# Altium PCB Insole_ver2.PcbDoc (part 2 of 3)
Units mil, origin at the board's own origin, x right, y up, seen from the top; angles counter-clockwise.
Board outline 8634.93 x 10258.5 mil, 2 copper layers (Top Layer, Bottom Layer); 507 components, 50 nets, 1329 pads, 253 vias.
Unrouted connection lines stored in the file: 728.
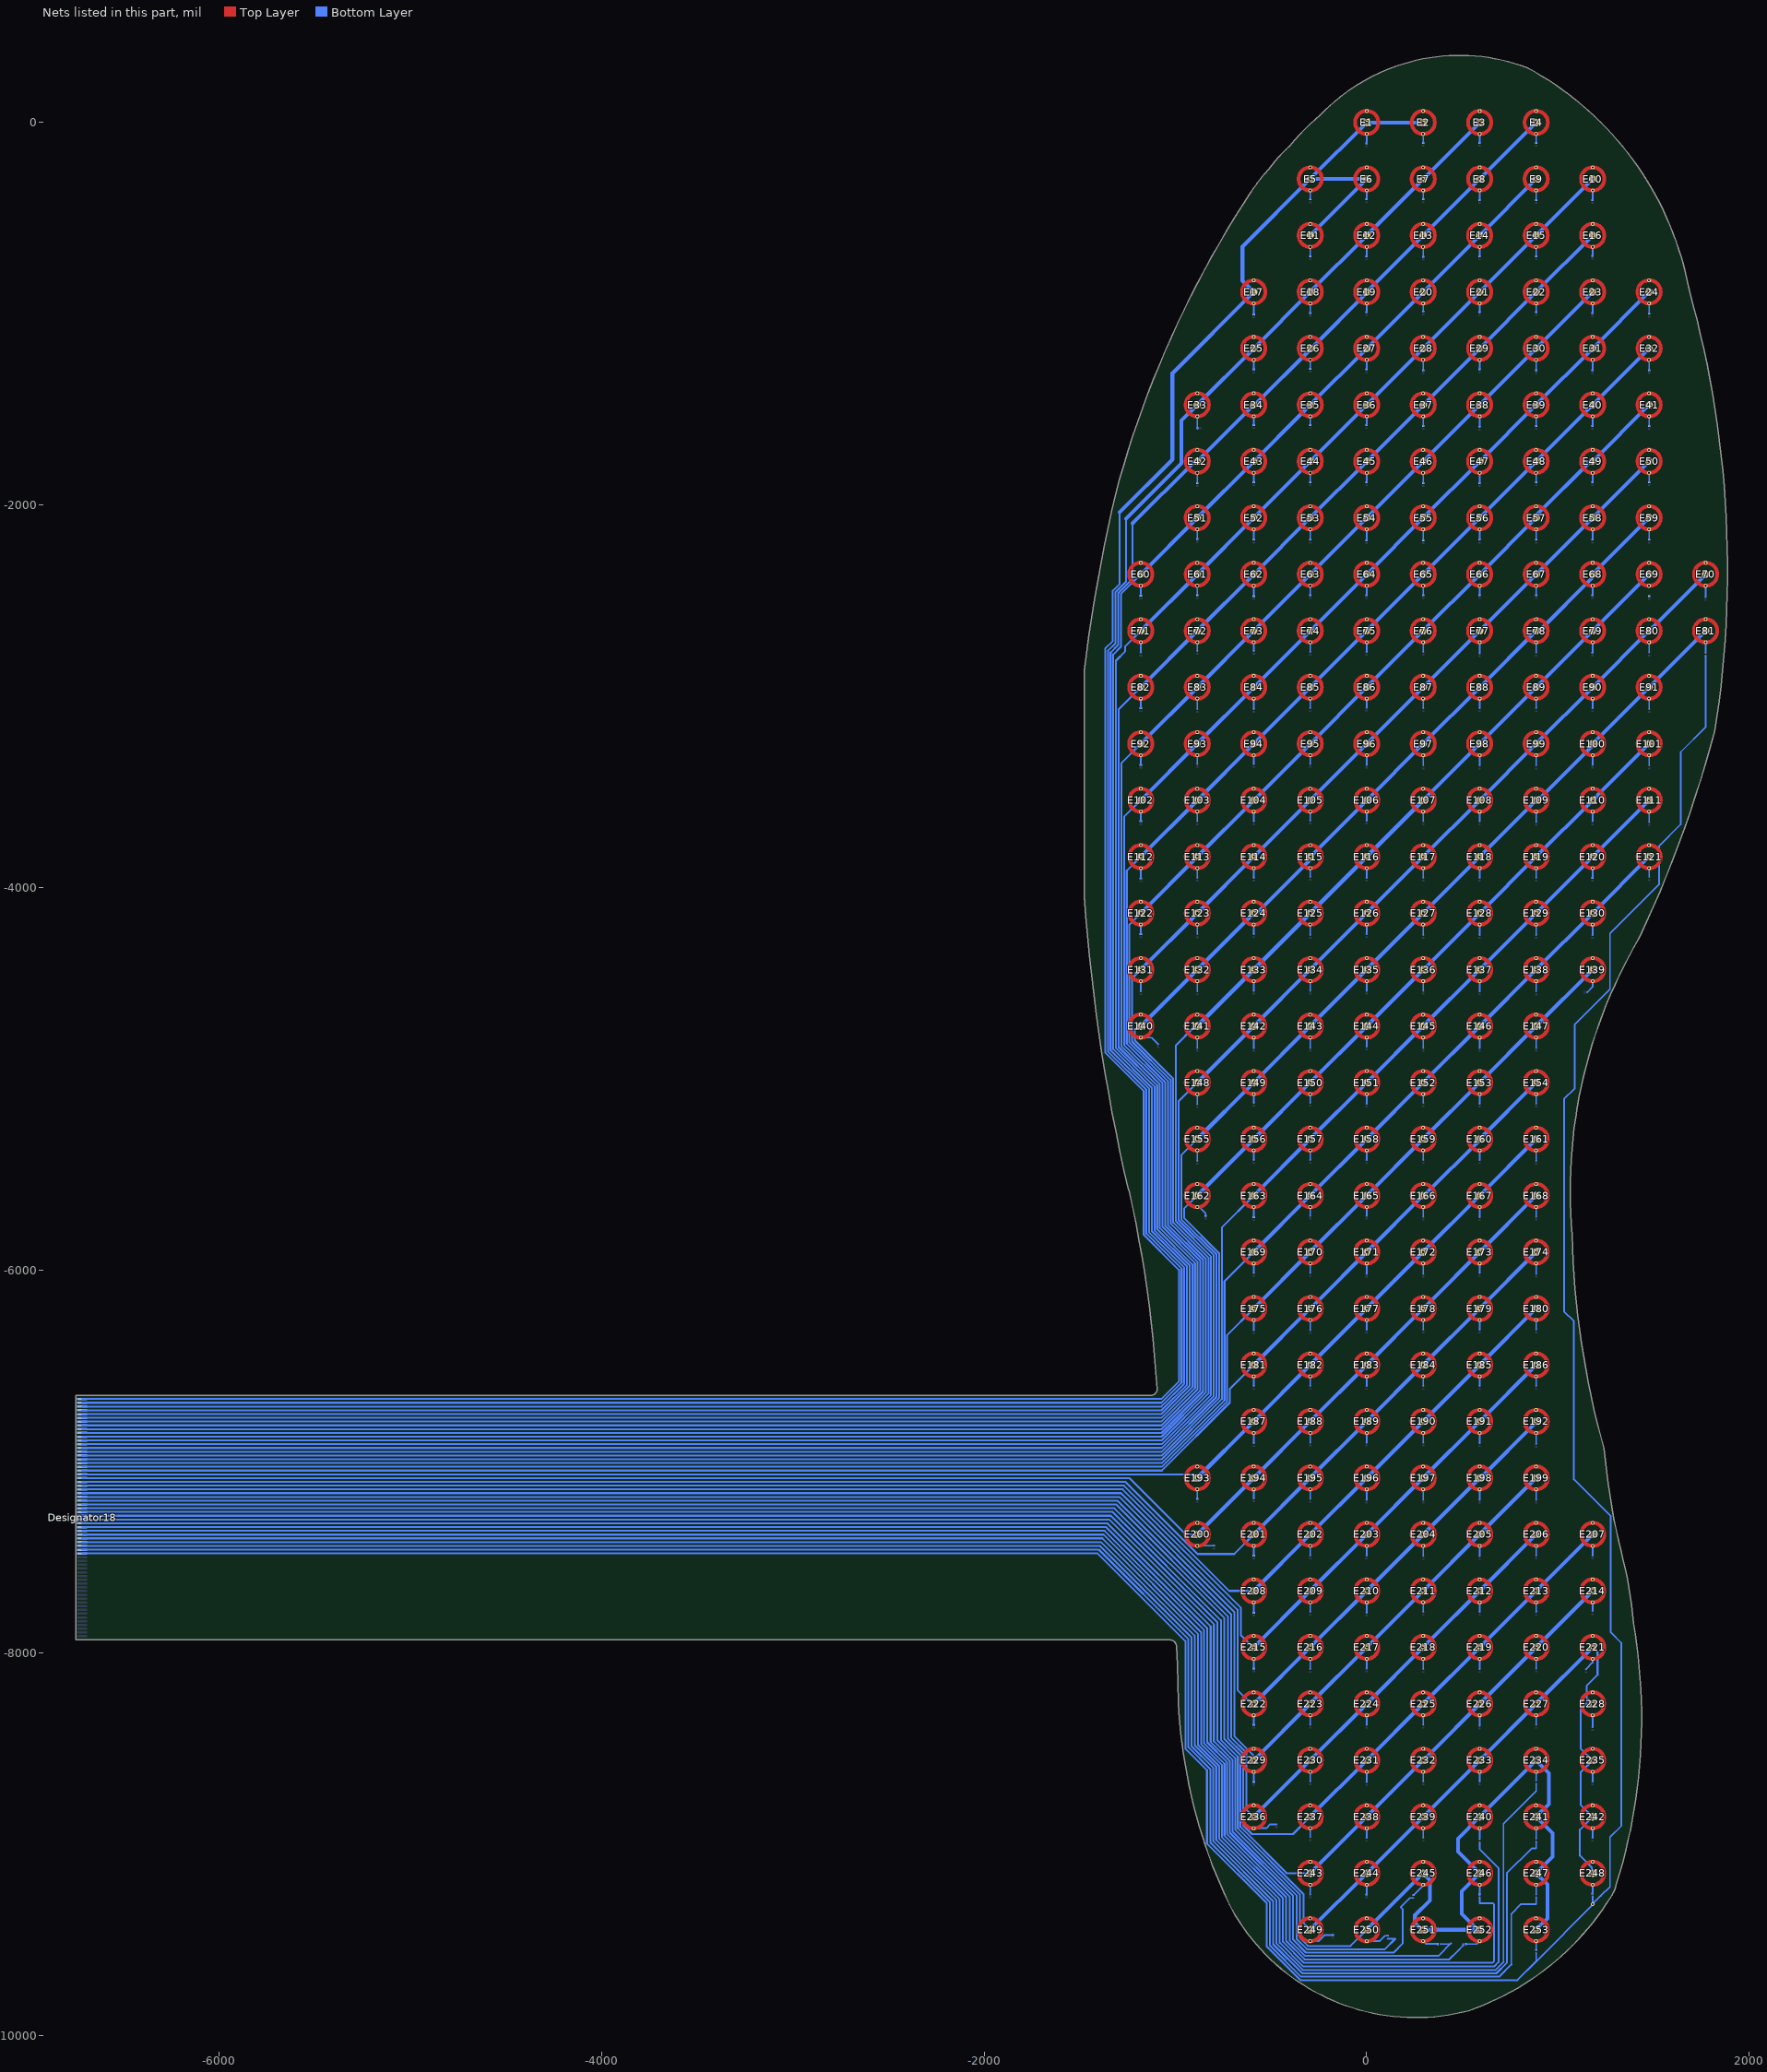
[diagram p2: the nets of this part, all layers, seen from the top]

## Part data
D? D?1 D?2 D?3 D?4 D?5 D?6 D?7 D?8 D?9 D?10 D?11 D?12 D?13 D?14 D?15 D?16 D?17 D?18 D?19 D?20 D?21 D?22 D?23 D?24 D?25 D?26 D?27 D?28 D?29 D?30 D?31 D?32 D?33 D?34 D?35 D?36 D?37 D?38 D?39 D?40 D?41 D?42 D?43 D?44 D?45 D?46 D?47 D?48 D?49 D?50 D?51 D?52 D?53 D?54 D?55 D?56 D?57 D?58 D?59 D?60 D?61 D?62 D?63 D?64 D?65 D?66 D?67 D?68 D?69 D?70 D?71 D?72 D?73 D?74 D?75 D?76 D?77 D?78 D?79 D?80 D?81 D?82 D?83 D?84 D?85 D?86 D?87 D?88 D?89 D?90 D?91 D?92 D?93 D?94 D?95 D?96 D?97 D?98 D?99 D?100 D?101 D?102 D?103 D?104 D?105 D?106 D?107 D?108 D?109 D?110 D?111 D?112 D?113 D?114 D?115 D?116 D?117 D?118 D?119 D?120 D?121 D?122 D?123 D?124 D?125 D?126 D?127 D?128 D?129 D?130 D?131 D?132 D?133 D?134 D?135 D?136 D?137 D?138 D?139 D?140 D?141 D?142 D?143 D?144 D?145 D?146 D?147 D?148 D?149 D?150 D?151 D?152 D?153 D?154 D?155 D?156 D?157 D?158 D?159 D?160 D?161 D?162 D?163 D?164 D?165 D?166 D?167 D?168 D?169 D?170 D?171 D?172 D?173 D?174 D?175 D?176 D?177 D?178 D?179 D?180 D?181 D?182 D?183 D?184 D?185 D?186 D?187 D?188 D?189 D?190 D?191 D?192 D?193 D?194 D?195 D?196 D?197 D?198 D?199 D?200 D?201 D?202 D?203 D?204 D?205 D?206 D?207 D?208 D?209 D?210 D?211 D?212 D?213 D?214 D?215 D?216 D?217 D?218 D?219 D?220 D?221 D?222 D?223 D?224 D?225 D?226 D?227 D?228 D?229 D?230 D?231 D?232 D?233 D?234 D?235 D?236 D?237 D?238 D?239 D?240 D?241 D?242 D?243 D?244 D?245 D?246 D?247 D?248 D?249 D?250 D?251 D?252: "Schottky Diode", Manufacturer_Name="ROHM Semiconductor", Mouser Part Number=755-RB520ZS-30T2R, Datasheet Link=https://fscdn.rohm.com/en/products/databook/datasheet/discrete/diode/schottky_barrier/rb520zs-30t2r-e.pdf, Height=0.36mm, Manufacturer_Part_Number=RB520ZS-30T2R, Mouser Price/Stock=https://www.mouser.com/Search/Refine.aspx?Keyword=755-RB520ZS-30T2R
E1 E2 E3 E4 E5 E6 E7 E8 E9 E10 E11 E12 E13 E14 E15 E16 E17 E18 E19 E20 E21 E22 E23 E24 E25 E26 E27 E28 E29 E30 E31 E32 E33 E34 E35 E36 E37 E38 E39 E40 E41 E42 E43 E44 E45 E46 E47 E48 E49 E50 E51 E52 E53 E54 E55 E56 E57 E58 E59 E60 E61 E62 E63 E64 E65 E66 E67 E68 E69 E70 E71 E72 E73 E74 E75 E76 E77 E78 E79 E80 E81 E82 E83 E84 E85 E86 E87 E88 E89 E90 E91 E92 E93 E94 E95 E96 E97 E98 E99 E100 E101 E102 E103 E104 E105 E106 E107 E108 E109 E110 E111 E112 E113 E114 E115 E116 E117 E118 E119 E120 E121 E122 E123 E124 E125 E126 E127 E128 E129 E130 E131 E132 E133 E134 E135 E136 E137 E138 E139 E140 E141 E142 E143 E144 E145 E146 E147 E148 E149 E150 E151 E152 E153 E154 E155 E156 E157 E158 E159 E160 E161 E162 E163 E164 E165 E166 E167 E168 E169 E170 E171 E172 E173 E174 E175 E176 E177 E178 E179 E180 E181 E182 E183 E184 E185 E186 E187 E188 E189 E190 E191 E192 E193 E194 E195 E196 E197 E198 E199 E200 E201 E202 E203 E204 E205 E206 E207 E208 E209 E210 E211 E212 E213 E214 E215 E216 E217 E218 E219 E220 E221 E222 E223 E224 E225 E226 E227 E228 E229 E230 E231 E232 E233 E234 E235 E236 E237 E238 E239 E240 E241 E242 E243 E244 E245 E246 E247 E248 E249 E250 E251 E252 E253: library part CMP-065-000001-1, Component Type=Standard, Design Item ID=Insole_electrode_v1, Pin Count=2, Source="Sheet1_sensor_mat_inso_v1 1.SCHLIB"

## Via types
v1: diameter 19.68, hole 9.84, Top Layer to Bottom Layer, tented both sides, 252 vias
v2: diameter 23.62, hole 9.84, Top Layer to Bottom Layer, tented both sides, 1 vias

## Nets (pads, with @x,y where several pads share a name; then routed paths per layer and width w, separated by ;. In a path a pad name is that pad's centre, name@x,y a point inside that pad or via, vN(x,y) a via of type N, cw(c..) or ccw(c..) an arc to the next point about the centre after c; other vN are vias at no path point)
Col1: D?1.2 D?2.2 D?3.2 D?5.2 D?6.2 D?7.2 D?8.2 D?9.2 D?15.2 D?16.2 D?20.2 D?21.2 D?22.2 D?23.2 D?24.2 D?25.2 D?26.2 D?30.2 D?31.2 D?.2 Designator18.33 E17.1 E33.1 E42.1 E60.1 E71.1 E82.1 E92.1 E102.1 E112.1 E122.1 E131.1 E140.1 E141.1 E148.1 E155.1 E162.1 E163.1 E169.1 E175.1 E181.1 E193.1 E200.1 E201.1 E208.1 E215.1 E222.1 E229.1 E236.1 E237.1 E243.1 E249.1 E250.1 | length 10577.6
  Bottom Layer w9: E140.1@-1181.1,-4784.41 -1125.04,-4784.41 -1090.55,-4818.9 ; -1181.1,-4543.31 E131.1@-1181.1,-4489.13 ; D?9.2@-1181.1,-4244.09 E122.1@-1181.1,-4193.86 ; D?8.2@-1181.1,-3952.76 E112.1@-1181.1,-3898.58 ; D?7.2@-1181.1,-3653.54 E102.1@-1181.1,-3603.31 ; D?6.2@-1181.1,-3358.27 E92.1@-1181.1,-3308.03 ; D?5.2@-1181.1,-3062.99 E82.1@-1181.1,-3012.76 ; -1181.1,-2771.65 E71.1@-1181.1,-2717.48 ; D?3.2@-1181.1,-2473.23 E60.1@-1181.1,-2422.2 ; E200.1@-885.83,-7441.89 -884.88,-7440.94 D?21.2@-799.21,-7440.94 ; D?20.2@-885.83,-7196.85 E193.1@-885.83,-7146.61 ; E162.1@-885.83,-5670.24 -883.85,-5672.21 -872.79,-5672.21 -842.52,-5702.48 D?15.2@-842.52,-5716.54 ; -885.83,-5429.13 E155.1@-885.83,-5374.96 ; -885.83,-5133.86 E148.1@-885.83,-5079.69 ; -885.83,-4838.58 E141.1@-885.83,-4784.41 ; D?2.2@-885.83,-1885.83 E42.1@-885.83,-1831.65 ; E33.1@-885.83,-1536.38 -885.83,-1597.01 -885.04,-1597.8 D?1.2@-885.04,-1598.43 ; E236.1@-590.55,-8918.27 -524.57,-8918.27 -503.94,-8897.64 -472.44,-8897.64 ; D?26.2@-590.55,-8677.17 E229.1@-590.55,-8622.99 ; D?25.2@-590.55,-8377.95 E222.1@-590.55,-8327.72 ; D?24.2@-590.55,-8082.68 E215.1@-590.55,-8032.44 ; D?23.2@-590.55,-7791.34 E208.1@-590.55,-7737.17 ; D?22.2@-590.55,-7492.13 E201.1@-590.55,-7441.89 ; -590.55,-6606.3 E181.1@-590.55,-6556.06 ; -590.55,-6314.96 E175.1@-590.55,-6260.79 ; -590.55,-6015.75 E169.1@-590.55,-5965.51 ; D?16.2@-590.55,-5724.41 E163.1@-590.55,-5670.24 ; D?.2@-590.55,-1003.94 E17.1@-590.55,-945.83 ; E249.1@-295.28,-9508.82 -252.91,-9508.82 -221.26,-9477.17 D?30.2@-177.17,-9477.17 ; -295.28,-9263.78 E243.1@-295.28,-9213.54 ; -295.28,-8964.57 E237.1@-295.28,-8918.27 ; E250.1@0,-9508.82 65.98,-9508.82 94.49,-9480.32 D?31.2@110.24,-9480.32 ; 110.24,-9495.28 147.54,-9495.28 147.98,-9495.72 149.26,-9495.72 149.61,-9496.06
  Bottom Layer w10: Designator18.33@-6715.55,-7304.13 -1345.87,-7304.13 -799,-7851 -799,-8463 -701.67,-8560.33 -701.67,-8934.33 -367,-9269 -367,-9496 -312,-9551 94.67,-9551 149.61,-9496.06
Col2: D?32.2 D?33.2 D?34.2 D?35.2 D?36.2 D?62.2 D?63.2 Designator18.34 E5.1 E25.1 E34.1 E51.1 E61.1 E72.1 E83.1 E93.1 E103.1 E113.1 E123.1 E132.1 E133.1 E142.1 E149.1 E156.1 E157.1 E164.1 E170.1 E176.1 E187.1 E194.1 E195.1 E202.1 E209.1 E216.1 E223.1 E230.1 E231.1 E238.1 E244.1 E245.1 | length 10475.2
  Bottom Layer w9: -885.83,-4543.31 E132.1@-885.83,-4489.13 ; -885.83,-4244.88 E123.1@-885.83,-4193.86 ; -885.83,-3948.82 E113.1@-885.83,-3898.58 ; -885.83,-3654.33 E103.1@-885.83,-3603.31 ; -885.83,-3354.33 E93.1@-885.83,-3308.03 ; -885.83,-3066.93 E83.1@-885.83,-3012.76 ; -885.83,-2763.78 E72.1@-885.83,-2717.48 ; D?36.2@-885.83,-2469.91 E61.1@-885.83,-2422.2 ; D?35.2@-885.83,-2177.17 E51.1@-885.83,-2126.93 ; -590.55,-7193.7 E194.1@-590.55,-7146.61 ; -590.55,-6905.51 E187.1@-590.55,-6851.34 ; -590.55,-5425.2 E156.1@-590.55,-5374.96 ; -590.55,-5125.98 E149.1@-590.55,-5079.69 ; -590.55,-4838.58 E142.1@-590.55,-4784.41 ; -590.55,-4539.37 E133.1@-590.55,-4489.13 ; D?34.2@-590.55,-1582.68 E34.1@-590.55,-1536.38 ; D?33.2@-590.55,-1291.34 E25.1@-590.55,-1241.1 ; -295.28,-8673.23 E230.1@-295.28,-8622.99 ; -295.28,-8377.95 E223.1@-295.28,-8327.72 ; -295.28,-8086.61 E216.1@-295.28,-8032.44 ; -295.28,-7787.4 E209.1@-295.28,-7737.17 ; -295.28,-7492.13 E202.1@-295.28,-7441.89 ; -295.28,-7196.85 E195.1@-295.28,-7146.61 ; -295.28,-6314.96 E176.1@-295.28,-6260.79 ; -295.28,-6015.75 E170.1@-295.28,-5965.51 ; -295.28,-5716.54 E164.1@-295.28,-5670.24 ; -295.28,-5425.2 E157.1@-295.28,-5374.96 ; D?32.2@-295.28,-402.36 E5.1@-295.28,-355.28 ; D?62.2@0,-9263.78 E244.1@0,-9213.54 ; 0,-8968.5 E238.1@0,-8918.27 ; 0,-8677.17 E231.1@0,-8622.99 ; 188.98,-9519.68 188.98,-9342.52 177.17,-9330.71 225.2,-9282.68 244.09,-9282.68 ; D?63.2@244.09,-9267.72 290.43,-9221.38 290.43,-9221.01 295.28,-9216.16 E245.1@295.28,-9213.54
  Bottom Layer w10: Designator18.34@-6715.55,-7323.82 -1355.18,-7323.82 -816,-7863 -816,-8467 -715.67,-8567.33 -715.67,-8941.33 -385,-9272 -385,-9501 -318,-9568 140.66,-9568 188.98,-9519.68
Col3: D?64.2 D?65.2 D?66.2 D?68.2 D?69.2 D?70.2 D?96.2 Designator18.35 E11.1 E18.1 E26.1 E43.1 E52.1 E62.1 E73.1 E84.1 E94.1 E104.1 E114.1 E124.1 E125.1 E134.1 E143.1 E150.1 E151.1 E158.1 E165.1 E171.1 E182.1 E188.1 E189.1 E196.1 E203.1 E210.1 E217.1 E224.1 E225.1 E232.1 E239.1 E251.1 | length 10523.7
  Bottom Layer w9: -590.55,-4244.09 E124.1@-590.55,-4193.86 ; -590.55,-3948.82 E114.1@-590.55,-3898.58 ; -590.55,-3653.54 E104.1@-590.55,-3603.31 ; -590.55,-3354.72 E94.1@-590.55,-3308.03 ; -590.55,-3066.93 E84.1@-590.55,-3012.76 ; -590.55,-2763.78 E73.1@-590.55,-2717.48 ; D?70.2@-590.55,-2473.58 E62.1@-590.55,-2422.2 ; D?69.2@-590.55,-2181.1 E52.1@-590.55,-2126.93 ; D?68.2@-590.55,-1881.89 E43.1@-590.55,-1831.65 ; -295.28,-6901.57 E188.1@-295.28,-6851.34 ; -295.28,-6606.3 E182.1@-295.28,-6556.06 ; -295.28,-5126.38 E150.1@-295.28,-5079.69 ; -295.28,-4838.58 E143.1@-295.28,-4784.41 ; -295.28,-4539.37 E134.1@-295.28,-4489.13 ; -295.28,-4248.03 E125.1@-295.28,-4193.86 ; D?66.2@-295.28,-1287.4 E26.1@-295.28,-1241.1 ; D?65.2@-295.28,-996.06 E18.1@-295.28,-945.83 ; D?64.2@-295.28,-700.79 E11.1@-295.28,-650.55 ; 0,-8377.95 E224.1@0,-8327.72 ; 0,-8083.46 E217.1@0,-8032.44 ; 0,-7791.34 E210.1@0,-7737.17 ; 0,-7492.13 E203.1@0,-7441.89 ; 0,-7200.79 E196.1@0,-7146.61 ; 0,-6901.57 E189.1@0,-6851.34 ; 0,-6020.08 E171.1@0,-5965.51 ; 0,-5716.54 E165.1@0,-5670.24 ; 0,-5425.2 E158.1@0,-5374.96 ; 0,-5129.92 E151.1@0,-5079.69 ; E251.1@295.28,-9508.82 308.85,-9522.39 369.64,-9522.39 D?96.2@370.87,-9523.62 ; 295.28,-8968.5 E239.1@295.28,-8918.27 ; 295.28,-8673.23 E232.1@295.28,-8622.99 ; 295.28,-8377.95 E225.1@295.28,-8327.72 ; 385.83,-9523.62 437.01,-9523.62 440.94,-9519.68
  Bottom Layer w10: Designator18.35@-6715.55,-7343.5 -1362.5,-7343.5 -834,-7872 -834,-8469 -729.67,-8573.33 -729.67,-8949.33 -403,-9276 -403,-9505 -322,-9586 374.63,-9586 440.94,-9519.68
Col4: D?67.2 D?97.2 D?98.2 D?99.2 D?104.2 D?105.2 D?106.2 D?219.2 Designator18.36 E6.1 E12.1 E19.1 E35.1 E44.1 E53.1 E63.1 E74.1 E85.1 E95.1 E105.1 E115.1 E116.1 E126.1 E135.1 E144.1 E145.1 E152.1 E159.1 E166.1 E177.1 E183.1 E184.1 E190.1 E197.1 E204.1 E211.1 E218.1 E219.1 E226.1 E233.1 E252.1 | length 10519.4
  Bottom Layer w9: -295.28,-3944.88 E115.1@-295.28,-3898.58 ; -295.28,-3649.61 E105.1@-295.28,-3603.31 ; -295.28,-3354.33 E95.1@-295.28,-3308.03 ; -295.28,-3062.99 E85.1@-295.28,-3012.76 ; -295.28,-2767.72 E74.1@-295.28,-2717.48 ; D?106.2@-295.28,-2472.44 E63.1@-295.28,-2422.2 ; D?105.2@-295.28,-2181.1 E53.1@-295.28,-2126.93 ; D?104.2@-295.28,-1881.89 E44.1@-295.28,-1831.65 ; D?67.2@-295.28,-1582.68 E35.1@-295.28,-1536.38 ; 0,-6606.3 E183.1@0,-6556.06 ; 0,-6311.02 E177.1@0,-6260.79 ; 0,-4831.5 E144.1@0,-4784.41 ; 0,-4539.37 E135.1@0,-4489.13 ; 0,-4244.09 E126.1@0,-4193.86 ; 0,-3948.82 E116.1@0,-3898.58 ; D?99.2@0,-992.13 E19.1@0,-945.83 ; D?98.2@0,-700.79 E12.1@0,-650.55 ; D?97.2@0,-401.57 E6.1@0,-355.28 ; 295.28,-8086.61 E218.1@295.28,-8032.44 ; 295.28,-7787.4 E211.1@295.28,-7737.17 ; 295.28,-7496.06 E204.1@295.28,-7441.89 ; 295.28,-7200.79 E197.1@295.28,-7146.61 ; 295.28,-6901.57 E190.1@295.28,-6851.34 ; 295.28,-6606.02 E184.1@295.28,-6556.06 ; 295.28,-5721.26 E166.1@295.28,-5670.24 ; 295.28,-5425.2 E159.1@295.28,-5374.96 ; 295.28,-5126.77 E152.1@295.28,-5079.69 ; 295.28,-4838.58 E145.1@295.28,-4784.41 ; 476.38,-9559.06 503.94,-9531.5 503.94,-9523.62 ; D?219.2@518.9,-9523.62 575.75,-9523.62 E252.1@590.55,-9508.82 ; 590.55,-8673.23 E233.1@590.55,-8622.99 ; 590.55,-8381.89 E226.1@590.55,-8327.72 ; 590.55,-8086.61 E219.1@590.55,-8032.44
  Bottom Layer w10: Designator18.36@-6715.55,-7363.19 -1369.81,-7363.19 -850,-7883 -850,-8474.33 -743.67,-8580.66 -743.67,-8956.33 -421,-9279 -421,-9508 -325,-9604 431.43,-9604 476.38,-9559.06
Col5: D?100.2 D?102.2 D?103.2 D?118.2 D?119.2 D?120.2 D?121.2 D?122.2 D?223.2 Designator18.37 E1.1 E7.1 E13.1 E27.1 E36.1 E45.1 E54.1 E64.1 E75.1 E86.1 E96.1 E106.1 E107.1 E117.1 E127.1 E136.1 E137.1 E146.1 E153.1 E160.1 E172.1 E178.1 E179.1 E185.1 E191.1 E198.1 E205.1 E212.1 E213.1 E220.1 E227.1 E246.1 | length 11038.2
  Bottom Layer w9: 0,-3649.61 E106.1@0,-3603.31 ; 0,-3358.27 E96.1@0,-3308.03 ; 0,-3059.06 E86.1@0,-3012.76 ; 0,-2767.72 E75.1@0,-2717.48 ; D?118.2@0,-2472.44 E64.1@0,-2422.2 ; D?119.2@0,-2185.04 E54.1@0,-2126.93 ; D?120.2@0,-1881.89 E45.1@0,-1831.65 ; D?121.2@0,-1582.68 E36.1@0,-1536.38 ; D?122.2@0,-1288.53 E27.1@0,-1241.1 ; D?100.2@0,-110.24 E1.1@0,-60 ; 295.28,-6311.02 E178.1@295.28,-6260.79 ; 295.28,-6019.68 E172.1@295.28,-5965.51 ; 295.28,-4539.76 E136.1@295.28,-4489.13 ; 295.28,-4248.03 E127.1@295.28,-4193.86 ; 295.28,-3948.82 E117.1@295.28,-3898.58 ; 295.28,-3653.54 E107.1@295.28,-3603.31 ; D?103.2@295.28,-701.57 E13.1@295.28,-650.55 ; D?102.2@295.28,-401.57 E7.1@295.28,-355.28 ; 590.55,-9279.53 590.55,-9311.02 660.14,-9311.02 666,-9316.88 666,-9612 ; D?223.2@590.55,-9264.57 E246.1@590.55,-9213.54 ; 590.55,-7787.4 E212.1@590.55,-7737.17 ; 590.55,-7496.06 E205.1@590.55,-7441.89 ; 590.55,-7200.79 E198.1@590.55,-7146.61 ; 590.55,-6905.51 E191.1@590.55,-6851.34 ; 590.55,-6606.3 E185.1@590.55,-6556.06 ; 590.55,-6311.02 E179.1@590.55,-6260.79 ; 590.55,-5425.59 E160.1@590.55,-5374.96 ; 590.55,-5129.92 E153.1@590.55,-5079.69 ; 590.55,-4838.58 E146.1@590.55,-4784.41 ; 590.55,-4543.31 E137.1@590.55,-4489.13 ; 885.83,-8377.95 E227.1@885.83,-8327.72 ; 885.83,-8083.46 E220.1@885.83,-8032.44 ; 885.83,-7787.4 E213.1@885.83,-7737.17
  Bottom Layer w10: Designator18.37@-6710.87,-7383 -1376,-7383 -866,-7893 -866,-8478.13 -757.67,-8586.46 -757.67,-8964.33 -438,-9284 -438,-9512 -328,-9622 656,-9622 666,-9612
Col6: D?101.2 D?123.2 D?125.2 D?131.2 D?139.2 D?141.2 D?150.2 D?151.2 D?161.2 Designator18.38 E2.1 E3.1 E8.1 E20.1 E28.1 E37.1 E46.1 E55.1 E65.1 E76.1 E87.1 E97.1 E98.1 E108.1 E118.1 E128.1 E129.1 E138.1 E147.1 E154.1 E167.1 E173.1 E174.1 E180.1 E186.1 E192.1 E199.1 E206.1 E207.1 E214.1 E221.1 E240.1 | length 11376.6
  Bottom Layer w9: 295.28,-3362.2 E97.1@295.28,-3308.03 ; 295.28,-3062.99 E87.1@295.28,-3012.76 ; 295.28,-2768.11 E76.1@295.28,-2717.48 ; D?161.2@295.28,-2472.44 E65.1@295.28,-2422.2 ; D?151.2@295.28,-2183.28 E55.1@295.28,-2126.93 ; D?150.2@295.28,-1885.83 E46.1@295.28,-1831.65 ; D?141.2@295.28,-1586.61 E37.1@295.28,-1536.38 ; D?139.2@295.28,-1295.28 E28.1@295.28,-1241.1 ; D?131.2@295.28,-988.19 E20.1@295.28,-945.83 ; D?101.2@295.28,-106.3 E2.1@295.28,-60 ; 590.55,-8991.34 590.55,-9027.56 688.98,-9125.98 688.98,-9617.61 ; 590.55,-8976.38 E240.1@590.55,-8918.27 ; 590.55,-6015.75 E173.1@590.55,-5965.51 ; 590.55,-5724.41 E167.1@590.55,-5670.24 ; 590.55,-4248.03 E128.1@590.55,-4193.86 ; 590.55,-3948.82 E118.1@590.55,-3898.58 ; 590.55,-3653.54 E108.1@590.55,-3603.31 ; 590.55,-3362.2 E98.1@590.55,-3308.03 ; D?125.2@590.55,-405.51 E8.1@590.55,-355.28 ; D?123.2@590.55,-106.3 E3.1@590.55,-60 ; 885.83,-7492.13 E206.1@885.83,-7441.89 ; 885.83,-7200.79 E199.1@885.83,-7146.61 ; 885.83,-6909.45 E192.1@885.83,-6851.34 ; 885.83,-6606.3 E186.1@885.83,-6556.06 ; 885.83,-6311.02 E180.1@885.83,-6260.79 ; 885.83,-6019.68 E174.1@885.83,-5965.51 ; 885.83,-5129.92 E154.1@885.83,-5079.69 ; 885.83,-4838.58 E147.1@885.83,-4784.41 ; 885.83,-4543.7 E138.1@885.83,-4489.13 ; 885.83,-4248.03 E129.1@885.83,-4193.86 ; 1145.67,-8087.01 1181.1,-8051.57 E221.1@1181.1,-8032.44 ; 1181.1,-7783.46 E214.1@1181.1,-7737.17 ; 1181.1,-7492.13 E207.1@1181.1,-7441.89
  Bottom Layer w10: Designator18.38@-6715.55,-7402.56 -6584.24,-7402.56 -1382.44,-7402.56 -883,-7902 -883,-8480.93 -771.67,-8592.26 -771.67,-8972.33 -455,-9289 -455,-9517 -331,-9641 665.59,-9641 688.98,-9617.61
Col7: D?124.2 D?128.2 D?132.2 D?140.2 D?142.2 D?149.2 D?152.2 D?160.2 D?180.2 Designator18.39 E4.1 E14.1 E21.1 E29.1 E38.1 E47.1 E56.1 E66.1 E77.1 E88.1 E89.1 E99.1 E109.1 E119.1 E120.1 E130.1 E139.1 E161.1 E168.1 E228.1 E234.1 | length 11180.8
  Bottom Layer w9: 590.55,-3062.99 E88.1@590.55,-3012.76 ; 590.55,-2775.59 E77.1@590.55,-2717.48 ; D?160.2@590.55,-2472.44 E66.1@590.55,-2422.2 ; D?152.2@590.55,-2181.1 E56.1@590.55,-2126.93 ; D?149.2@590.55,-1885.83 E47.1@590.55,-1831.65 ; D?142.2@590.55,-1590.55 E38.1@590.55,-1536.38 ; D?140.2@590.55,-1291.34 E29.1@590.55,-1241.1 ; D?132.2@590.55,-992.13 E21.1@590.55,-945.83 ; D?128.2@590.55,-700.79 E14.1@590.55,-650.55 ; 715,-9617 715,-8895.24 885.83,-8724.41 885.83,-8685.04 ; 885.83,-8670.08 E234.1@885.83,-8622.99 ; 885.83,-5720.47 E168.1@885.83,-5670.24 ; 885.83,-5429.53 E161.1@885.83,-5374.96 ; 885.83,-3948.82 E119.1@885.83,-3898.58 ; 885.83,-3657.48 E109.1@885.83,-3603.31 ; 885.83,-3362.2 E99.1@885.83,-3308.03 ; 885.83,-3062.99 E89.1@885.83,-3012.76 ; D?124.2@885.83,-106.3 E4.1@885.83,-60 ; 1152.76,-4547.24 1181.1,-4518.9 E139.1@1181.1,-4489.13 ; 1181.1,-8389.76 E228.1@1181.1,-8327.72 ; 1181.1,-4248.03 E130.1@1181.1,-4193.86 ; D?180.2@1181.1,-3948.82 E120.1@1181.1,-3898.58
  Bottom Layer w10: Designator18.39@-6715.55,-7422.24 -1388.76,-7422.24 -900,-7911 -900,-8483.73 -787,-8596.73 -787,-8979 -472,-9294 -472,-9521 -334,-9659 673,-9659 715,-9617
Col8: D?126.2 D?129.2 D?133.2 D?138.2 D?143.2 D?148.2 D?153.2 D?159.2 D?165.2 Designator18.40 E9.1 E15.1 E22.1 E30.1 E39.1 E48.1 E57.1 E67.1 E78.1 E79.1 E90.1 E100.1 E110.1 E111.1 E121.1 E235.1 E241.1 | length 10668.4
  Bottom Layer w9: 732.28,-9622.05 732.28,-9153.54 862.2,-9023.62 885.83,-9023.62 885.83,-8987.4 ; 885.83,-8972.44 E241.1@885.83,-8918.27 ; 885.83,-2771.65 E78.1@885.83,-2717.48 ; D?159.2@885.83,-2472.44 E67.1@885.83,-2422.2 ; D?153.2@885.83,-2178.83 E57.1@885.83,-2126.93 ; D?148.2@885.83,-1881.89 E48.1@885.83,-1831.65 ; D?143.2@885.83,-1586.61 E39.1@885.83,-1536.38 ; D?138.2@885.83,-1295.28 E30.1@885.83,-1241.1 ; D?133.2@885.83,-992.13 E22.1@885.83,-945.83 ; D?129.2@885.83,-700.79 E15.1@885.83,-650.55 ; D?126.2@885.83,-405.51 E9.1@885.83,-355.28 ; 1181.1,-8674.02 E235.1@1181.1,-8622.99 ; 1181.1,-3654.33 E110.1@1181.1,-3603.31 ; 1181.1,-3358.27 E100.1@1181.1,-3308.03 ; 1181.1,-3062.99 E90.1@1181.1,-3012.76 ; D?165.2@1181.1,-2771.65 E79.1@1181.1,-2717.48 ; 1476.38,-3945.67 E121.1@1476.38,-3898.58 ; 1476.38,-3657.48 E111.1@1476.38,-3603.31
  Bottom Layer w10: Designator18.40@-6715.55,-7441.93 -1394.07,-7441.93 -916,-7920 -916,-8489 -802,-8603 -802,-8986 -489,-9299 -489,-9525 -337,-9677 677.33,-9677 732.28,-9622.05
Col9: D?127.2 D?130.2 D?134.2 D?137.2 D?144.2 D?147.2 D?154.2 D?157.2 D?158.2 Designator18.41 E10.1 E16.1 E23.1 E31.1 E40.1 E49.1 E58.1 E68.1 E69.1 E80.1 E91.1 E101.1 E242.1 E247.1 | length 10230.9
  Bottom Layer w9: 755.91,-9629.92 755.91,-9366.14 807.09,-9314.96 885.83,-9314.96 885.83,-9279.13 ; 885.83,-9264.17 E247.1@885.83,-9213.54 ; 1181.1,-8968.5 E242.1@1181.1,-8918.27 ; D?158.2@1181.1,-2472.44 E68.1@1181.1,-2422.2 ; D?154.2@1181.1,-2181.1 E58.1@1181.1,-2126.93 ; D?147.2@1181.1,-1881.89 E49.1@1181.1,-1831.65 ; D?144.2@1181.1,-1586.61 E40.1@1181.1,-1536.38 ; D?137.2@1181.1,-1295.28 E31.1@1181.1,-1241.1 ; D?134.2@1181.1,-996.06 E23.1@1181.1,-945.83 ; D?130.2@1181.1,-696.85 E16.1@1181.1,-650.55 ; D?127.2@1181.1,-405.51 E10.1@1181.1,-355.28 ; 1476.38,-3362.2 E101.1@1476.38,-3308.03 ; 1476.38,-3066.93 E91.1@1476.38,-3012.76 ; 1476.38,-2771.65 E80.1@1476.38,-2717.48
  Bottom Layer w10: Designator18.41@-6715.55,-7461.61 -3866.14,-7461.61 -3854.34,-7461.61 -1400.39,-7461.61 -932,-7930 -932,-8495 -818,-8609 -818,-8992 -506,-9304 -506,-9531 -343,-9694 691.83,-9694 755.91,-9629.92
Col10: D?135.2 D?136.2 D?145.2 D?146.2 D?155.2 D?220.2 D?221.2 Designator18.42 E24.1 E32.1 E41.1 E50.1 E59.1 E70.1 E81.1 E248.1 E253.1 | length 17243
  Bottom Layer w9: 885.83,-9570.08 885.83,-9614.17 1181.1,-9318.9 v1(1181.1,-9314.96) ; D?220.2@885.83,-9555.12 E253.1@885.83,-9508.82 ; 1181.1,-9274.8 v1(1181.1,-9314.96) ; D?221.2@1181.1,-9259.84 E248.1@1181.1,-9213.54 ; D?155.2@1476.38,-2177.38 E59.1@1476.38,-2126.93 ; D?146.2@1476.38,-1881.89 E50.1@1476.38,-1831.65 ; D?145.2@1476.38,-1586.61 E41.1@1476.38,-1536.38 ; D?136.2@1476.38,-1295.28 E32.1@1476.38,-1241.1 ; D?135.2@1476.38,-1000 E24.1@1476.38,-945.83 ; 1771.65,-2787.4 1771.65,-2838.58 1771.65,-3161.42 1641.73,-3291.34 1641.73,-3618.11 1641.73,-3641.73 1641.73,-3669.29 1527.56,-3783.46 1527.56,-3984.25 1271.65,-4240.16 1271.65,-4531.5 1086.61,-4716.54 1086.61,-5051.18 1031.5,-5106.3 1031.5,-6216.54 1082.68,-6267.72 1082.68,-7094.49 1276,-7287.81 1276,-7894.11 1330.71,-7948.82 1330.71,-8905.51 1271.65,-8964.57 1271.65,-9224.41 1224.41,-9271.65 v1(1181.1,-9314.96) ; 1771.65,-2772.44 E81.1@1771.65,-2717.48 ; 1771.65,-2480.71 E70.1@1771.65,-2422.2
  Bottom Layer w10: Designator18.42@-6715.55,-7481.3 -1406.7,-7481.3 -948,-7940 -948,-8501 -835,-8614 -835,-8998 -523,-9310 -523,-9536 -347,-9712 788,-9712 885.83,-9614.17
Col11: 
Col12: 
Col13: 
Col14: 
Col15: 
Col16: 
Col17: 
Col18: 
Row1: Designator18.1 E1.0 E2.0 E5.0 E6.0 E11.0 E17.0 | length 14137.1
  Bottom Layer w10: Designator18.1@-6715.55,-6674.21 -4212.6,-6674.21 -1073.77,-6674.21 -981.65,-6582.09 -981.65,-5998.66 -1165.35,-5814.96 -1165.35,-5064.24 -1367.02,-4862.57 -1367.02,-4857.39 -1367.02,-2751.02 -1327.21,-2711.21 -1327.21,-2448.92 -1291.34,-2413.04 -1291.34,-2037.4
  Bottom Layer w19.68: -1291.34,-2037.4 -1015.75,-1761.81 -1015.75,-1311.02 E17.0@-590.55,-885.83 -649.61,-826.77 -649.61,-649.61 E5.0@-295.28,-295.28 E1.0@0,0 E2.0@295.28,0 ; E11.0@-295.28,-590.55 E6.0@0,-295.28
  Bottom Layer w20: E5.0@-295.28,-295.28 E6.0@0,-295.28
Row2: Designator18.2 E3.0 E7.0 E12.0 E18.0 E25.0 E33.0 | length 13339.1
  Bottom Layer w10: Designator18.2@-6715.55,-6693.9 -4212.6,-6693.9 -1240.16,-6693.9 -1233.85,-6693.9 -1073.5,-6693.9 -967.65,-6588.05 -967.65,-5992.86 -1151.35,-5809.16 -1151.35,-5058.45 -1353.02,-4856.78 -1353.02,-4851.7 -1353.02,-2762.02 -1313.21,-2722.21 -1313.21,-2454.72 -1257.87,-2399.38 -1257.87,-2071.85
  Bottom Layer w19.68: -1257.87,-2071.85 -968.5,-1782.48 -968.5,-1559.06 E33.0@-885.83,-1476.38 E25.0@-590.55,-1181.1 E18.0@-295.28,-885.83 E12.0@0,-590.55 ; E12.0@3.77,-586.78 E3.0@590.55,0
Row3: Designator18.3 E4.0 E8.0 E13.0 E19.0 E26.0 E34.0 E42.0 | length 13497
  Bottom Layer w10: Designator18.3@-6715.55,-6713.58 -4212.6,-6713.58 -1240.16,-6713.58 -1233.85,-6713.58 -1073.39,-6713.58 -953.65,-6593.85 -953.65,-5987.06 -1137.35,-5803.36 -1137.35,-5052.65 -1339.02,-4850.98 -1339.02,-4842.08 -1339.02,-2771.02 -1299.21,-2731.21 -1299.21,-2460.52 -1223.43,-2384.73 -1223.43,-2096.46 ; E42.0@-904.24,-1777.27 E42.0@-891.45,-1777.27
  Bottom Layer w19.68: -1223.43,-2096.46 E42.0@-904.24,-1777.27 ; E42.0@-893.58,-1779.41 E34.0@-590.55,-1476.38 ; E34.0@-588.05,-1478.88 -292.78,-1183.6 E19.0@2.5,-888.33 ; E19.0@0,-885.83 E4.0@885.83,0
Row4: Designator18.4 E9.0 E14.0 E20.0 E27.0 E35.0 E43.0 E51.0 E60.0 | length 13211
  Bottom Layer w10: Designator18.4@-6715.55,-6733.27 -6593.5,-6733.27 -4212.6,-6733.27 -1240.16,-6733.27 -1233.85,-6733.27 -1073.27,-6733.27 -939.65,-6599.65 -939.65,-5981.26 -1123.35,-5797.56 -1123.35,-5046.85 -1325.02,-4845.18 -1325.02,-2781.6 -1285.21,-2741.79 -1285.21,-2466.31 E60.0@-1181.1,-2362.2
  Bottom Layer w19.68: E60.0@-1181.1,-2362.2 E51.0@-885.83,-2066.93 E43.0@-590.55,-1771.65 -344.49,-1525.59 E35.0@-295.28,-1476.38 E27.0@0,-1181.1 E14.0@590.55,-590.55 E9.0@885.83,-295.28
Row5: Designator18.5 E10.0 E15.0 E21.0 E28.0 E36.0 E44.0 E52.0 E61.0 E71.0 | length 13353.1
  Bottom Layer w10: Designator18.5@-6715.55,-6752.95 -6593.5,-6752.95 -4212.6,-6752.95 -1233.85,-6752.95 -1073.16,-6752.95 -925.65,-6605.44 -925.65,-5975.47 -1109.35,-5791.77 -1109.35,-5041.05 -1310.6,-4839.8 -1310.6,-4835.07 -1311.02,-4834.65 -1311.02,-2814.02 -1262,-2765 -1262,-2738.38 E71.0@-1181.1,-2657.48 ; 871.83,-604.55 E15.0@891.63,-604.55
  Bottom Layer w19.68: E71.0@-1181.1,-2657.48 E61.0@-885.83,-2362.2 E52.0@-590.55,-2066.93 E44.0@-295.28,-1771.65 E36.0@0,-1476.38 E28.0@295.28,-1181.1 871.83,-604.55 ; E15.0@885.83,-590.55 E10.0@1181.1,-295.28
Row6: Designator18.6 E16.0 E22.0 E29.0 E37.0 E45.0 E53.0 E62.0 E72.0 E82.0 | length 13077.2
  Bottom Layer w10: Designator18.6@-6715.55,-6772.64 -6593.5,-6772.64 -4212.6,-6772.64 -1240.16,-6772.64 -1233.85,-6772.64 -1073.05,-6772.64 -911.65,-6611.24 -911.65,-5969.67 -1095.35,-5785.97 -1095.35,-5035.25 -1296.6,-4834.01 -1296.6,-3343.73 -1296.6,-3068.25 E82.0@-1181.1,-2952.76
  Bottom Layer w19.68: E82.0@-1181.1,-2952.76 E72.0@-885.83,-2657.48 E62.0@-590.55,-2362.2 E53.0@-295.28,-2066.93 E45.0@0,-1771.65 E29.0@590.55,-1181.1 E22.0@885.83,-885.83 E16.0@1181.1,-590.55
Row7: Designator18.7 E23.0 E30.0 E38.0 E46.0 E54.0 E63.0 E73.0 E83.0 E92.0 | length 12801.7
  Bottom Layer w10: Designator18.7@-6715.55,-6792.32 -4212.6,-6792.32 -1240.16,-6792.32 -1233.85,-6792.32 -1072.93,-6792.32 -897.65,-6617.04 -897.65,-5963.87 -1081.35,-5780.17 -1081.35,-5029.45 -1282.6,-4828.21 -1282.6,-4175.96 -1282.6,-3349.53 E92.0@-1181.1,-3248.03
  Bottom Layer w19.68: E92.0@-1181.1,-3248.03 E83.0@-885.83,-2952.76 E73.0@-590.55,-2657.48 E63.0@-295.28,-2362.2 E54.0@0,-2066.93 E46.0@295.28,-1771.65 E23.0@1181.1,-885.83
Row8: Designator18.8 E24.0 E31.0 E39.0 E47.0 E55.0 E64.0 E74.0 E84.0 E93.0 E102.0 | length 12943.7
  Bottom Layer w10: Designator18.8@-6715.55,-6812.01 -4212.6,-6812.01 -1240.16,-6812.01 -1233.85,-6812.01 -1072.82,-6812.01 -883.65,-6622.84 -883.65,-5958.07 -1067.35,-5774.37 -1067.35,-5023.65 -1268.6,-4822.41 -1268.6,-4181.76 -1268.6,-3630.8 E102.0@-1181.1,-3543.31
  Bottom Layer w19.68: E102.0@-1181.1,-3543.31 E93.0@-885.83,-3248.03 E84.0@-590.55,-2952.76 E64.0@0,-2362.2 E55.0@295.28,-2066.93 E47.0@590.55,-1771.65 E39.0@885.83,-1476.38 E31.0@1181.1,-1181.1 E24.0@1476.38,-885.83
Row9: Designator18.9 E32.0 E40.0 E48.0 E56.0 E65.0 E75.0 E85.0 E94.0 E103.0 E112.0 | length 12668.2
  Bottom Layer w10: Designator18.9@-6715.55,-6831.69 -4212.6,-6831.69 -1240.16,-6831.69 -1233.85,-6831.69 -1072.71,-6831.69 -869.65,-6628.64 -869.65,-5952.27 -1053.35,-5768.57 -1053.35,-5017.85 -1254.6,-4816.61 -1254.6,-4187.56 -1254.6,-3912.08 E112.0@-1181.1,-3838.58
  Bottom Layer w19.68: E112.0@-1181.1,-3838.58 E103.0@-885.83,-3543.31 E94.0@-590.55,-3248.03 E85.0@-295.28,-2952.76 E75.0@0,-2657.48 E65.0@295.28,-2362.2 E56.0@590.55,-2066.93 E48.0@885.83,-1771.65 E32.0@1476.38,-1181.1
Row10: Designator18.10 E41.0 E49.0 E57.0 E66.0 E76.0 E86.0 E95.0 E104.0 E113.0 E122.0 | length 12399.6
  Bottom Layer w10: Designator18.10@-6715.55,-6851.38 -4212.6,-6851.38 -1240.16,-6851.38 -1233.85,-6851.38 -1072.59,-6851.38 -855.65,-6634.44 -855.65,-5946.47 -1039.35,-5762.77 -1039.35,-5012.05 -1240.6,-4810.81 -1240.6,-4193.35 E122.0@-1181.1,-4133.86
  Bottom Layer w19.68: E122.0@-1181.1,-4133.86 E113.0@-885.83,-3838.58 E104.0@-590.55,-3543.31 E76.0@295.28,-2657.48 E66.0@590.55,-2362.2 E57.0@885.83,-2066.93 885.83,-2061.6 895.03,-2052.39 895.03,-2045.91 1165.52,-1775.42 1177.34,-1775.42 E49.0@1181.1,-1771.65 E41.0@1476.38,-1476.38
Row11: Designator18.11 E50.0 E58.0 E67.0 E77.0 E87.0 E96.0 E105.0 E114.0 E123.0 E131.0 | length 12117.2
  Bottom Layer w10: Designator18.11@-6715.55,-6871.06 -4212.6,-6871.06 -1240.16,-6871.06 -1233.85,-6871.06 -1072.48,-6871.06 -841.65,-6640.24 -841.65,-5940.67 -1025.35,-5756.97 -1025.35,-5006.26 -1226.6,-4805.01 -1226.6,-4474.63 E131.0@-1181.1,-4429.13
  Bottom Layer w19.68: E131.0@-1181.1,-4429.13 E123.0@-885.83,-4133.86 E114.0@-590.55,-3838.58 E105.0@-295.28,-3543.31 E96.0@0,-3248.03 E87.0@295.28,-2952.76 E77.0@590.55,-2657.48 E67.0@885.83,-2362.2 E58.0@1181.1,-2066.93 E50.0@1476.38,-1771.65
Row12: Designator18.12 E59.0 E68.0 E78.0 E88.0 E97.0 E106.0 E115.0 E124.0 E132.0 E140.0 | length 11867
  Bottom Layer w10: Designator18.12@-6715.55,-6890.75 -4212.6,-6890.75 -1240.16,-6890.75 -1233.85,-6890.75 -1072.36,-6890.75 -827.65,-6646.04 -827.65,-5934.87 -1011.35,-5751.17 -1011.35,-5000.46 -1212.6,-4799.21 -1212.6,-4744.09 -1201.53,-4733.03 -1197.67,-4733.03 -1189.05,-4724.41 E140.0@-1181.1,-4724.41
  Bottom Layer w19.68: E140.0@-1181.1,-4724.41 E132.0@-885.83,-4429.13 -586.78,-4130.09 -571.04,-4130.09 -299.04,-3858.1 -299.04,-3842.35 E106.0@0,-3543.31 E97.0@295.28,-3248.03 E88.0@590.55,-2952.76 889.59,-2653.71 905.34,-2653.71 1177.34,-2381.72 1177.34,-2365.97 E59.0@1476.38,-2066.93
Row13: Designator18.13 E69.0 E79.0 E89.0 E98.0 E107.0 E116.0 E125.0 E133.0 E141.0 | length 11406.3
  Bottom Layer w10: Designator18.13@-6715.55,-6910.43 -4212.6,-6910.43 -1240.16,-6910.43 -1233.85,-6910.43 -1072.25,-6910.43 -813.65,-6651.84 -813.65,-5929.08 -997.35,-5745.37 -997.35,-4824.13 -906.26,-4733.03 -902.39,-4733.03 -893.77,-4724.41 E141.0@-885.83,-4724.41
  Bottom Layer w19.68: E141.0@-885.83,-4724.41 E69.0@1476.38,-2362.2
Row14: Designator18.14 E70.0 E80.0 E90.0 E99.0 E108.0 E117.0 E126.0 E134.0 E142.0 E148.0 | length 11541.4
  Bottom Layer w10: Designator18.14@-6715.55,-6930.12 -4212.6,-6930.12 -1240.16,-6930.12 -1233.85,-6930.12 -1072.14,-6930.12 -799.65,-6657.63 -799.65,-5923.28 -983.35,-5739.58 -983.35,-5117.21 E148.0@-885.83,-5019.69
  Bottom Layer w19.68: E148.0@-885.83,-5019.69 E142.0@-590.55,-4724.41 E134.0@-295.28,-4429.13 E117.0@295.28,-3838.58 E108.0@590.55,-3543.31 E99.0@885.83,-3248.03 E90.0@1181.1,-2952.76 E80.0@1476.38,-2657.48 1525.59,-2608.27 E70.0@1771.65,-2362.2
Row15: Designator18.15 E81.0 E91.0 E100.0 E109.0 E118.0 E127.0 E135.0 E143.0 E149.0 E155.0 | length 11271.7
  Bottom Layer w10: Designator18.15@-6715.55,-6949.8 -4212.6,-6949.8 -1240.16,-6949.8 -1233.85,-6949.8 -1072.02,-6949.8 -785.65,-6663.43 -785.65,-5917.48 -969.35,-5733.78 -969.35,-5398.49 E155.0@-885.83,-5314.96
  Bottom Layer w19.68: E155.0@-885.83,-5314.96 E149.0@-590.55,-5019.69 E143.0@-295.28,-4724.41 E109.0@885.83,-3543.31 891.15,-3543.31 901,-3533.46 905.51,-3533.46 1177.34,-3261.64 1177.34,-3251.8 E100.0@1181.1,-3248.03 E81.0@1771.65,-2657.48
Row16: Designator18.16 E101.0 E110.0 E119.0 E128.0 E136.0 E144.0 E150.0 E156.0 E162.0 | length 10572.8
  Bottom Layer w10: Designator18.16@-6715.55,-6969.49 -4212.6,-6969.49 -1240.16,-6969.49 -1233.85,-6969.49 -1071.91,-6969.49 -771.65,-6669.23 -771.65,-5911.68 -955.35,-5727.98 -955.35,-5679.76 E162.0@-885.83,-5610.24
  Bottom Layer w19.68: E162.0@-885.83,-5610.24 E156.0@-590.55,-5314.96 E150.0@-295.28,-5019.69 E144.0@0,-4724.41 E128.0@590.55,-4133.86 E119.0@885.83,-3838.58 E110.0@1181.1,-3543.31 1230.31,-3494.09 E101.0@1476.38,-3248.03
Row17: Designator18.17 E111.0 E120.0 E129.0 E137.0 E145.0 E151.0 E157.0 E163.0 | length 10145.1
  Bottom Layer w10: Designator18.17@-6715.55,-6989.17 -4212.6,-6989.17 -1240.16,-6989.17 -1233.85,-6989.17 -1071.8,-6989.17 -757.65,-6675.03 -757.65,-5777.34 E163.0@-590.55,-5610.24
  Bottom Layer w19.68: E163.0@-590.55,-5610.24 E157.0@-295.28,-5314.96 E151.0@0,-5019.69 E145.0@295.28,-4724.41 E137.0@590.55,-4429.13 E129.0@885.83,-4133.86 E120.0@1181.1,-3838.58 E111.0@1476.38,-3543.31
Row18: Designator18.18 E121.0 E130.0 E138.0 E146.0 E152.0 E158.0 E164.0 E169.0 | length 9864.3
  Bottom Layer w10: Designator18.18@-6715.55,-7008.86 -6511.65,-7008.86 -4212.6,-7008.86 -1240.16,-7008.86 -1233.85,-7008.86 -1071.68,-7008.86 -743.65,-6680.83 -743.65,-6058.61 E169.0@-590.55,-5905.51
  Bottom Layer w19.68: E169.0@-590.55,-5905.51 E164.0@-295.28,-5610.24 E158.0@0,-5314.96 E152.0@295.28,-5019.69 E146.0@590.55,-4724.41 ; E146.0@594.32,-4720.64 E138.0@885.83,-4429.13 E130.0@1181.1,-4133.86 E121.0@1476.38,-3838.58
Row19: Designator18.19 E139.0 E147.0 E153.0 E159.0 E165.0 E170.0 E175.0 | length 9176.5
  Bottom Layer w10: Designator18.19@-6715.55,-7028.54 -4212.6,-7028.54 -1240.16,-7028.54 -1233.85,-7028.54 -1071.57,-7028.54 -729.65,-6686.63 -729.65,-6339.89 E175.0@-590.55,-6200.79
  Bottom Layer w19.68: E175.0@-590.55,-6200.79 E170.0@-295.28,-5905.51 E165.0@0,-5610.24 E159.0@295.28,-5314.96 E153.0@590.55,-5019.69 E147.0@885.83,-4724.41 E139.0@1181.1,-4429.13
Row20: Designator18.20 E154.0 E160.0 E166.0 E171.0 E176.0 E181.0 | length 8481.2
  Bottom Layer w10: Designator18.20@-6715.55,-7048.23 -4212.6,-7048.23 -1240.16,-7048.23 -1233.85,-7048.23 -1071.45,-7048.23 -715.65,-6692.43 -715.65,-6621.17 E181.0@-590.55,-6496.06
  Bottom Layer w19.68: E181.0@-590.55,-6496.06 E176.0@-295.28,-6200.79 -255.91,-6161.42 E171.0@0,-5905.51 E166.0@295.28,-5610.24 ; E166.0@299.04,-5606.47 304.37,-5606.47 590.55,-5320.29 E160.0@590.55,-5314.96 E154.0@885.83,-5019.69
Row21: Designator18.21 E161.0 E167.0 E172.0 E177.0 E182.0 E187.0 E193.0 | length 8343
  Bottom Layer w10: Designator18.21@-6715.55,-7067.91 -4212.6,-7067.91 -1240.16,-7067.91 -1233.85,-7067.91 -906.37,-7067.91 -887.67,-7086.61 E193.0@-885.83,-7086.61
  Bottom Layer w19.68: E193.0@-885.83,-7086.61 E187.0@-590.55,-6791.34 E182.0@-295.28,-6496.06 E172.0@295.28,-5905.51 E167.0@590.55,-5610.24 E161.0@885.83,-5314.96
Row22: Designator18.22 E168.0 E173.0 E178.0 E183.0 E188.0 E194.0 E200.0 | length 8457.1
  Bottom Layer w10: Designator18.22@-6715.55,-7087.6 -4212.6,-7087.6 -1239.4,-7087.6 -945.11,-7381.89 E200.0@-885.83,-7381.89
  Bottom Layer w19.68: E200.0@-885.83,-7381.89 E194.0@-590.55,-7086.61 E188.0@-295.28,-6791.34 E183.0@0,-6496.06 E178.0@295.28,-6200.79 334.65,-6161.42 E173.0@590.55,-5905.51 E168.0@885.83,-5610.24
Row23: Designator18.23 E174.0 E179.0 E184.0 E189.0 E195.0 E201.0 | length 8411.5
  Bottom Layer w10: Designator18.23@-6715.55,-7107.28 -4212.6,-7107.28 -1261.72,-7107.28 -884.75,-7484.25 -692.91,-7484.25 E201.0@-590.55,-7381.89
  Bottom Layer w19.68: E201.0@-590.55,-7381.89 E195.0@-295.28,-7086.61 E189.0@0,-6791.34 E184.0@295.28,-6496.06 E179.0@590.55,-6200.79 E174.0@885.83,-5905.51
Row24: Designator18.24 E180.0 E185.0 E190.0 E196.0 E202.0 E208.0 | length 8440.8
  Bottom Layer w10: Designator18.24@-6715.55,-7126.97 -4212.6,-7126.97 -1269.03,-7126.97 -718.83,-7677.17 E208.0@-590.55,-7677.17
  Bottom Layer w19.68: E208.0@-590.55,-7677.17 E202.0@-295.28,-7381.89 E196.0@0,-7086.61 E185.0@590.55,-6496.06 E180.0@885.83,-6200.79
Row25: Designator18.25 E186.0 E191.0 E197.0 E203.0 E209.0 E215.0 | length 8639.2
  Bottom Layer w10: Designator18.25@-6715.55,-7146.65 -4212.6,-7146.65 -1276.35,-7146.65 -657,-7766 -657,-7909.86 -594.41,-7972.44 E215.0@-590.55,-7972.44
  Bottom Layer w19.68: E215.0@-590.55,-7972.44 E209.0@-295.28,-7677.17 E203.0@0,-7381.89 E197.0@295.28,-7086.61 E191.0@590.55,-6791.34 E186.0@885.83,-6496.06
Row26: Designator18.26 E192.0 E198.0 E204.0 E210.0 E216.0 E222.0 | length 8917.7
  Bottom Layer w10: Designator18.26@-6715.55,-7166.34 -4212.6,-7166.34 -1284.66,-7166.34 -675.42,-7775.58 -675.42,-8194.66 -610.98,-8259.1 -607.12,-8259.1 -598.5,-8267.72 E222.0@-590.55,-8267.72
  Bottom Layer w19.68: E222.0@-590.55,-8267.72 E216.0@-295.28,-7972.44 E210.0@0,-7677.17 E198.0@590.55,-7086.61 595.88,-7086.61 885.83,-6796.67 E192.0@885.83,-6791.34
Row27: Designator18.27 E199.0 E205.0 E211.0 E217.0 E223.0 E229.0 | length 9177.7
  Bottom Layer w10: Designator18.27@-6715.55,-7186.02 -6513.34,-7186.02 -1292.98,-7186.02 -692,-7787 -692,-8437 -596.17,-8532.83 -596.17,-8549.42 -589.38,-8556.22 E229.0@-583.78,-8556.22
  Bottom Layer w19.68: E229.0@-590.55,-8562.99 -583.78,-8556.22 E223.0@-295.28,-8267.72 E217.0@0,-7972.44 E199.0@885.83,-7086.61
Row28: Designator18.28 E206.0 E212.0 E218.0 E224.0 E230.0 E236.0 | length 9448.5
  Bottom Layer w10: Designator18.28@-6715.55,-7205.71 -4212.6,-7205.71 -1302.29,-7205.71 -709,-7799 -709,-8443 -629.92,-8522.08 -629.92,-8818.9 E236.0@-590.55,-8858.27
  Bottom Layer w19.68: E236.0@-590.55,-8858.27 -551.18,-8818.9 E230.0@-295.28,-8562.99 E224.0@0,-8267.72 E218.0@295.28,-7972.44 333.66,-7934.06 E212.0@590.55,-7677.17 E206.0@885.83,-7381.89
Row29: Designator18.29 E207.0 E213.0 E219.0 E225.0 E231.0 E237.0 | length 9853
  Bottom Layer w10: Designator18.29@-6715.55,-7225.39 -4212.6,-7225.39 -1310.61,-7225.39 -726,-7810 -726,-8448 -645.67,-8528.33 -645.67,-8903.33 -600.18,-8948.82 -385.83,-8948.82 E237.0@-295.28,-8858.27
  Bottom Layer w19.68: E237.0@-295.28,-8858.27 E231.0@0,-8562.99 E225.0@295.28,-8267.72 E219.0@590.55,-7972.44 E207.0@1181.1,-7381.89
Row30: Designator18.30 E214.0 E220.0 E226.0 E232.0 E238.0 E243.0 | length 9888.6
  Bottom Layer w10: Designator18.30@-6715.55,-7245.08 -4212.6,-7245.08 -1318.92,-7245.08 -744,-7820 -744,-8452 -659.67,-8536.33 -659.67,-8911.33 -417.46,-9153.54 E243.0@-295.28,-9153.54
  Bottom Layer w19.68: E243.0@-295.28,-9153.54 E238.0@0,-8858.27 E232.0@295.28,-8562.99 334.65,-8523.62 E226.0@590.55,-8267.72 E214.0@1181.1,-7677.17
Row31: Designator18.31 E221.0 E227.0 E228.0 E233.0 E235.0 E239.0 E242.0 E244.0 E248.0 E249.0 | length 11496.4
  Bottom Layer w10: Designator18.31@-6715.55,-7264.76 -4212.6,-7264.76 -1328.24,-7264.76 -762,-7831 -762,-8456 -673.67,-8544.33 -673.67,-8919.33 -330.71,-9262.29 -330.71,-9413.39 E249.0@-295.28,-9448.82 ; E248.0@1181.1,-9153.54 1176.42,-9148.86 1176.42,-9123.99 1114.17,-9061.75 1114.17,-8925.2 E242.0@1181.1,-8858.27 1118.11,-8795.28 1118.11,-8625.98 E235.0@1181.1,-8562.99 1180.24,-8562.99 1118.11,-8500.86 1118.11,-8295.28 1145.67,-8267.72 E228.0@1181.1,-8267.72 1149.61,-8236.22 1149.61,-8173.23 1206.47,-8116.36 1206.47,-7997.81 E221.0@1181.1,-7972.44
  Bottom Layer w19.68: E249.0@-295.28,-9448.82 E244.0@0,-9153.54 E233.0@590.55,-8562.99 E227.0@885.83,-8267.72 E221.0@1181.1,-7972.44
Row32: Designator18.32 E234.0 E240.0 E241.0 E245.0 E246.0 E247.0 E250.0 E251.0 E252.0 E253.0 | length 11714.8
  Bottom Layer w10: Designator18.32@-6715.55,-7284.45 -6637.8,-7284.45 -4212.6,-7284.45 -1337.55,-7284.45 -781,-7841 -781,-8459 -687.67,-8552.33 -687.67,-8926.33 -350.39,-9263.61 -350.39,-9490.61 -307.34,-9533.66 -84.84,-9533.66 E250.0@0,-9448.82
  Bottom Layer w19.68: E250.0@0,-9448.82 E245.0@295.28,-9153.54 330.71,-9188.98 330.71,-9295.28 251.97,-9374.02 251.97,-9417.32 255.83,-9417.32 287.33,-9448.82 E251.0@295.28,-9448.82 E252.0@578.74,-9448.82 ; E252.0@590.55,-9448.82 E252.0@578.74,-9448.82 ; E253.0@885.83,-9448.82 944.88,-9389.76 944.88,-9212.6 E247.0@885.83,-9153.54 972.44,-9066.93 972.44,-8944.88 E241.0@885.83,-8858.27 952.76,-8791.34 952.76,-8629.92 E234.0@885.83,-8562.99 E240.0@590.55,-8858.27 476.38,-8972.44 476.38,-9039.37 E246.0@590.55,-9153.54 496.06,-9248.03 496.06,-9366.14 E252.0@578.74,-9448.82